# Altium PCB Diana.PcbDoc
Units mm, origin at the board's own origin, x right, y up, seen from the top; angles counter-clockwise.
Board outline 50 x 40 mm, 2 copper layers (Top Layer, Bottom Layer), stack 1.443 mm thick; 44 components, 33 nets, 210 pads, 87 vias.
Unrouted connection lines stored in the file: 40.
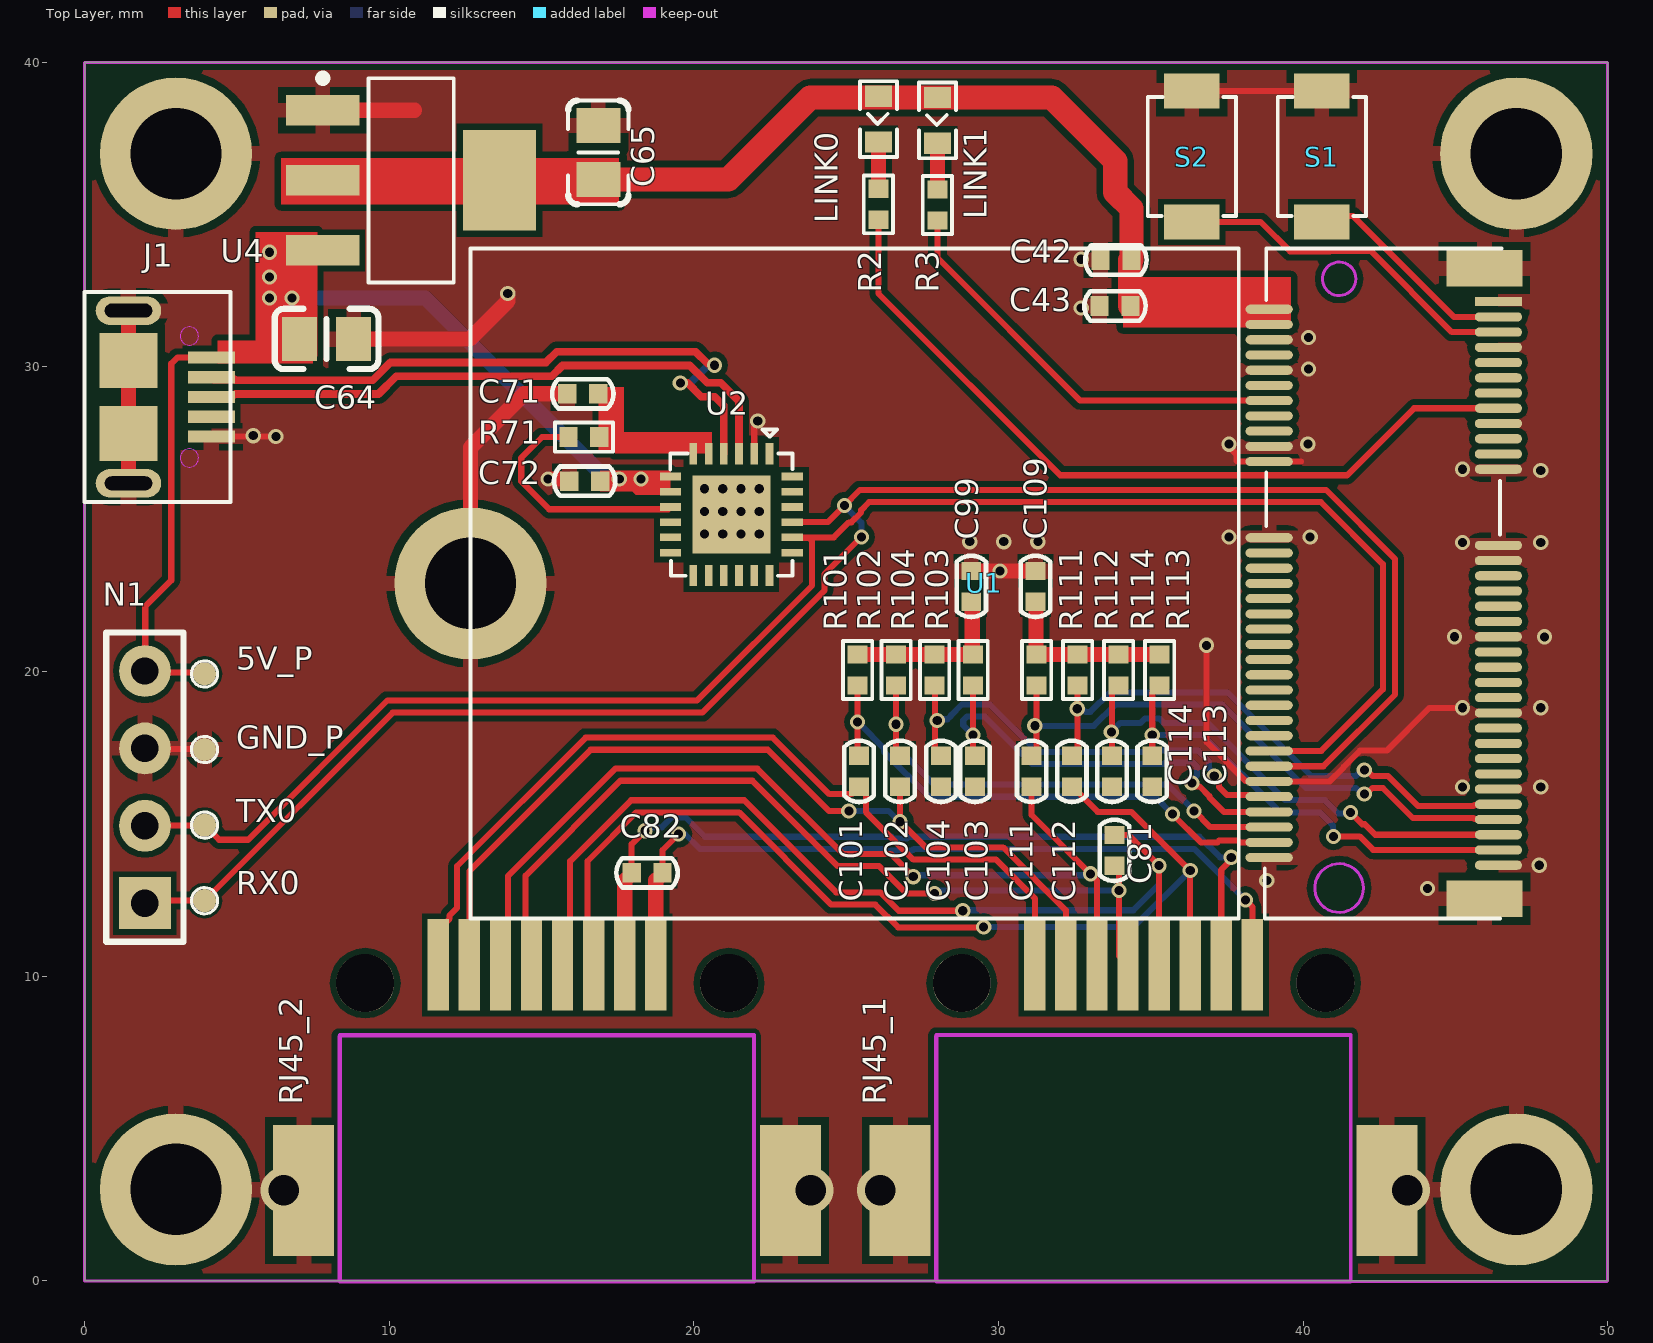
[diagram p0: Top Layer view]
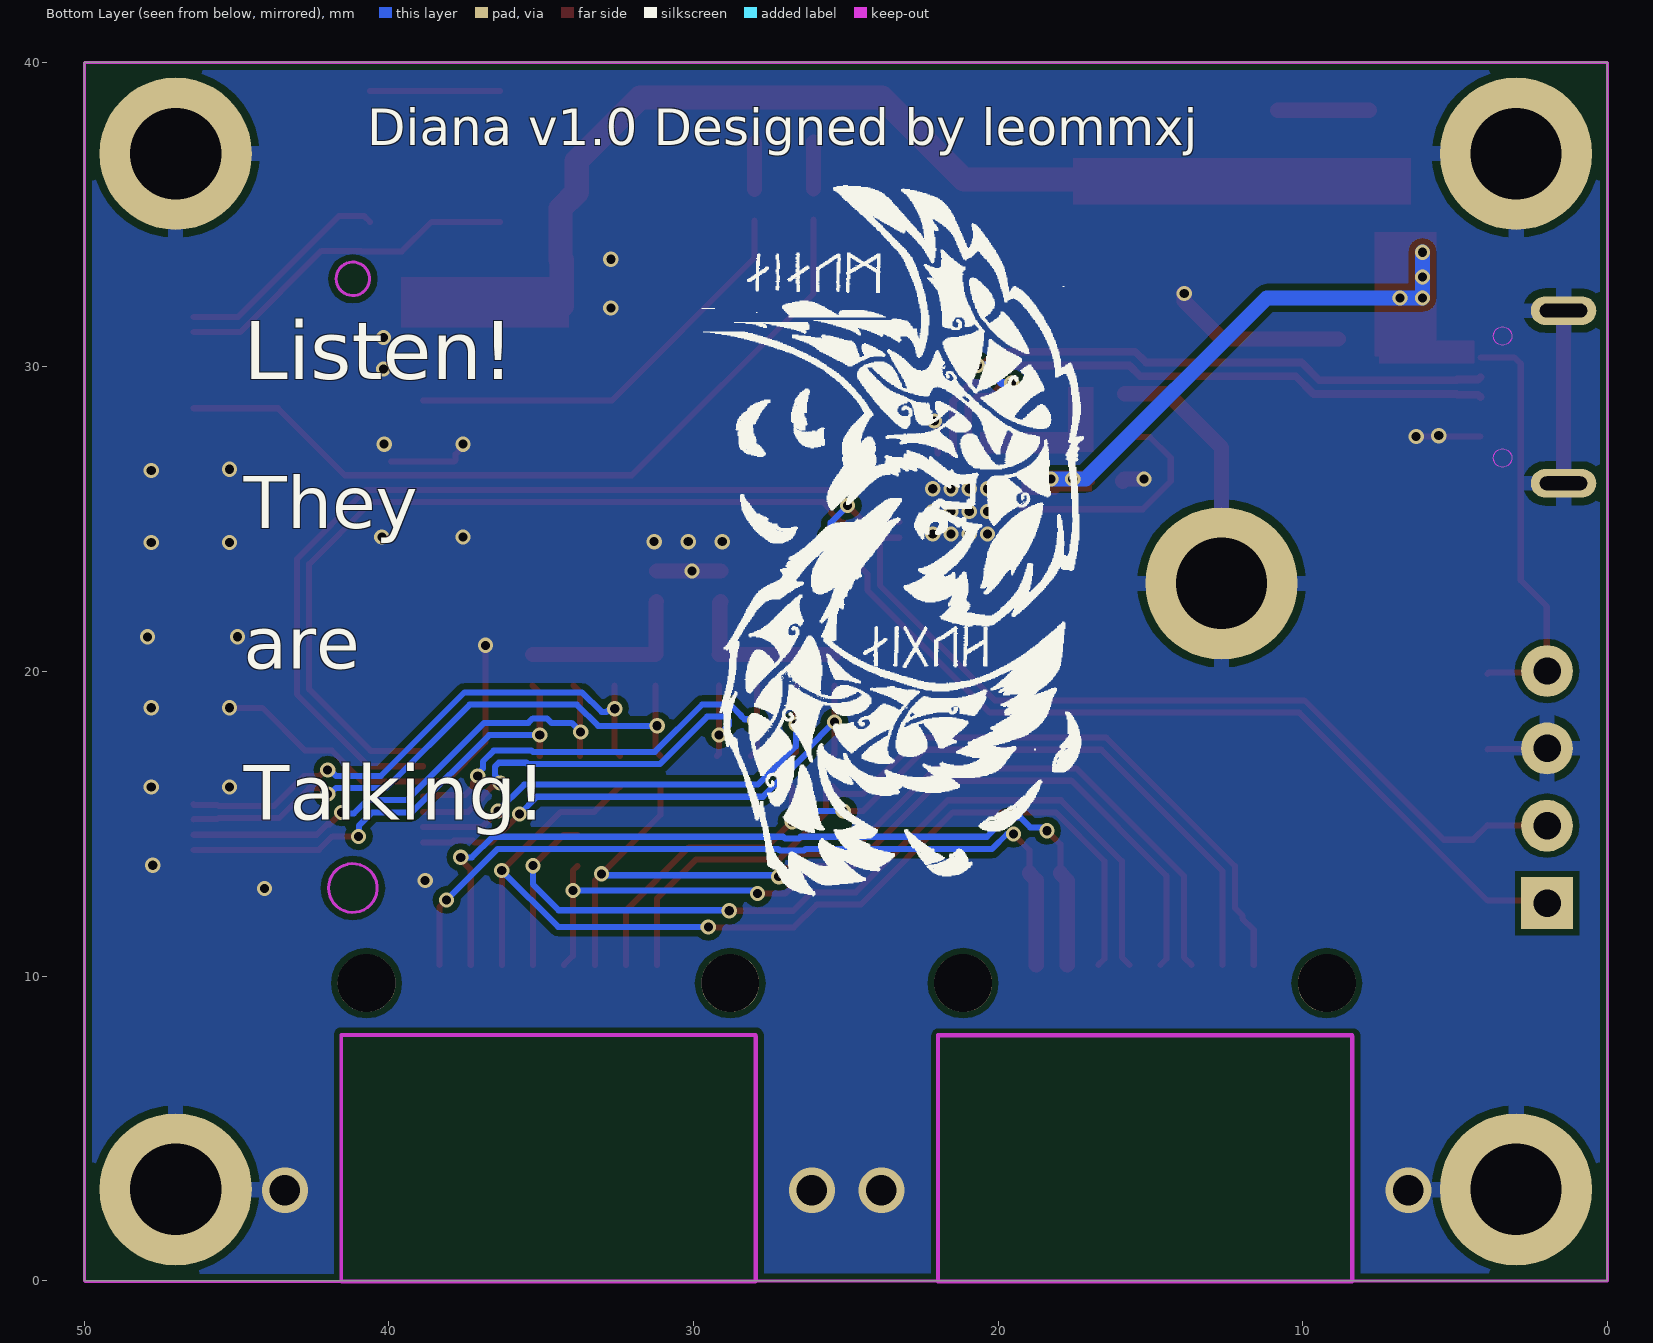
[diagram p1: Bottom Layer view, seen from below]

## Layer stack, top to bottom
Top Solder: solder mask 0.0102, Solder Resist, Dk 3.5
Top Layer: signal copper 0.0356
Dielectric1: core 1.3716, FR-4, Dk 4.8
Bottom Layer: signal copper 0.0356
Bottom Solder: solder mask 0.0102, Solder Resist, Dk 3.5

## Board outline
0,0 50,0 50,40 0,40

## Design rules (kind name [scope] priority, off if disabled: settings)
Clearance [All] p1: gap=0.2 ignorepadtopadclearanceinfootprint=TRUE
ComponentClearance [All] p1 off: gap=0.025 collisioncheckmode=3 verticalgap=0.025 showdistances=FALSE
DiffPairsRouting [All] p1: maxlimit=0.2 minlimit=0.2 mostfreqgap=0.2 toplayer_minwidth=0.2 toplayer_maxwidth=0.2 toplayer_prefwidth=0.2 bottomlayer_minwidth=0.2 bottomlayer_maxwidth=0.2 bottomlayer_prefwidth=0.2 maxuncoupledlength=12.7
FabricationTestPointUsage TestPointUsage [All] p1 off: valid=0 allowmultiple=FALSE
FabricationTestpoint Testpoint [(IsPad And (OnTopLayer Or OnBottomLayer))] p1 off: side=3 testpointundercomponent=TRUE minsize=1.016 maxsize=2.54 preferedsize=1.524 minholesize=0 maxholesize=1.016 preferedholesize=0.813 testpointgrid=0.025 allowsidetop=TRUE allowsidebottom=TRUE usegrid=TRUE gridtolerance=0
HoleSize [All] p1: absolutevalues=TRUE maxlimit=3.81 minlimit=0.203 maxpercent=80.000 minpercent=20.000
MinimumSolderMaskSliver [All] p1 off: minsoldermaskwidth=0.025
PlaneClearance [All] p1: clearance=0.152
PlaneConnect PlaneConnect_isvia [IsVia] p1: planeconnectstyle=Direct reliefexpansion=0.508 reliefentries=4 reliefconductorwidth=0.508 reliefairgap=0.254
PlaneConnect [All] p2: planeconnectstyle=Direct reliefexpansion=0.508 reliefentries=4 reliefconductorwidth=0.635 reliefairgap=0.254
PolygonConnect [All] p1: thpad.connectstyle=Relief thpad.reliefconductorwidth=0.5 thpad.reliefentries=4 thpad.polygonreliefangle="90 Angle" thpad.airgapwidth=0.254 smdpad.connectstyle=Relief smdpad.reliefconductorwidth=0.5 smdpad.reliefentries=4 smdpad.polygonreliefangle="90 Angle" smdpad.airgapwidth=0.254 via.connectstyle=Direct via.reliefconductorwidth=0.254 via.reliefentries=4 via.polygonreliefangle="90 Angle" via.airgapwidth=0.254
RoutingVias [All] p1: holewidth=0.203 width=0.406 viastyle="Through Hole" minholewidth=0.203 minwidth=0.406 maxholewidth=2.54 maxwidth=2.54
ShortCircuit [InNet('WIFI') vs InNet('GND')] p1: allowed=FALSE
SilkToSilkClearance [All] p1: silktosilkclearance=0
SilkToSolderMaskClearance SilkscreenOverComponentPads [IsPad] p1: minsilkscreentomaskgap=0 clearancetoexposedcopper=TRUE
SolderMaskExpansion [All] p1: expansion=0.05
UnRoutedNet [All] p1: checkbadconnections=TRUE
Width [All] p1: maxlimit=0.8 minlimit=0.2 preferedwidth=0.5
18 further rules are at their usual default settings.

## Classes and differential pairs
differential pair P1_T: +P1_T_P -P1_T_N
differential pair P1_R: +P1_R_P -P1_R_N
differential pair P0_T: +P0_T_P -P0_T_N
differential pair P0_R: +P0_R_P -P0_R_N
differential pair U: +U_P -U_N

## Components (designator, comment, footprint, x,y, rotation, side; value= is the part's Value field where it differs from the comment)
5V_P "TEST POINT" TEST-POINT 3.937,19.921 r180 top
C42 "4.7uF" C0402 33.858,33.51 r180 top
C43 "0.1uF" C0402 33.825,32.004 r180 top
C64 "47uF" 0805C 7.944,30.919 r0 top
C65 "47uF" 0805C 16.866,37.041 r270 top
C71 "4.7uF" C0402 16.355,29.118 r180 top
C72 "4.7uF" C0402 16.416,26.25 r0 top
C81 "Cap" C0402 33.807,14.13 r90 top value=220pF
C82 "Cap" C0402 18.466,13.393 r0 top value=220pF
C99 "0.1uF" C0402 29.108,22.797 r90 top
C101 "0.1uF" C0402 25.425,16.726 r270 top
C102 "0.1uF" C0402 26.772,16.726 r270 top
C103 "0.1uF" C0402 29.232,16.726 r270 top
C104 "0.1uF" C0402 28.114,16.726 r270 top
C109 "0.1uF" C0402 31.217,22.797 r90 top
C111 "0.1uF" C0402 31.09,16.726 r270 top
C112 "0.1uF" C0402 32.41,16.726 r270 top
C113 "0.1uF" C0402 35.048,16.726 r270 top
C114 "0.1uF" C0402 33.727,16.726 r270 top
GND_P "TEST POINT" TEST-POINT 3.937,17.44 r180 top (schematic designator GNP_P)
J1 "MK5P microUSB" MICROUSB 2.388,29.014 r270 top
LINK0 "LED" LED0603 26.061,38.133 r270 top (schematic designator DS1)
LINK1 "LED" LED0603 27.999,38.096 r270 top (schematic designator DS2)
N1 "Header 4" HDR-1X4 1.981,12.399 r90 top
R2 "5.1K" R0402 26.061,35.339 r270 top
R3 "5.1K" R0402 27.999,35.314 r90 top
R71 "5.1K" R0402 16.391,27.698 r180 top
R101 "50R" R0402 25.375,20.053 r270 top
R102 "50R" R0402 26.639,20.053 r270 top
R103 "50R" R0402 29.167,20.053 r270 top
R104 "50R" R0402 27.903,20.053 r270 top
R111 "50R" R0402 31.25,20.053 r270 top
R112 "50R" R0402 32.596,20.053 r270 top
R113 "50R" R0402 35.289,20.053 r270 top
R114 "50R" R0402 33.942,20.053 r270 top
RJ45_1 "RJ45" RJ45 34.765,10.371 r0 top
RJ45_2 "RJ45" RJ45 15.181,10.371 r0 top
RX0 "TEST POINT" TEST-POINT 3.937,12.479 r0 top
S1 "SW-BUTTON" MINIBUTTON 40.615,36.914 r270 top
S2 "SW-BUTTON" MINIBUTTON 36.347,36.914 r270 top
TX0 "TEST POINT" TEST-POINT 3.937,14.96 r180 top
U1 "BIT5" NGFF_M_2-EKEY 29.54,22.893 r270 top locked
U2 "CP2104" QFN24 21.234,25.154 r270 top
U4 "LM1117-3.3" SOT223-4N 10.719,36.126 r0 top

## Footprints (in the part's own frame and the unit in brackets; to place one, negate y for a bottom-side part, rotate by r counter-clockwise, add the part's x,y. Pads: shape width x height; smd on the part's side, far side on the other; paste and mask are expansions set on the pad)
0805C [mm]
  rect 1.15x1.45 smd: 1(-0.889,0) 2(0.889,0)
  silkscreen extent -1.7,-0.99 1.7,0.99, body extent -1,-0.63 1,0.63, height 0.78
C0402 [mm]
  rect 0.6x0.65 smd: 1(-0.508,0) 2(0.508,0)
  silkscreen extent -1.01,-0.48 1.01,0.48, body extent -0.51,-0.23 0.49,0.27, height 0.5
HDR-1X4 [mm] "排针，4脚"
  rect 1.7x1.7 hole 0.9: 1(0,0)
  round 1.7 hole 0.9: 2(2.54,0) 3(5.08,0) 4(7.62,0)
  silkscreen extent -1.27,-1.27 8.89,1.27, body extent -1.27,-1.27 8.89,1.27, height 8.5
LED0603 [mm]
  rect 0.7x0.9 smd: A(-0.75,0) K(0.75,0)
  silkscreen extent -1.24,-0.61 1.24,0.61
MICROUSB [mil]
  rect 15.75x60.31 smd: 1(-51.17,70.09) 2(-25.58,70.09) 3(0.01,70.09) 4(25.6,70.09) 5(51.19,70.09)
  oval 37x84.65 hole 17.72 slot 61.02 at 90 deg: 6(-111.6,-37.26) 7(111.62,-37.26)
  rect 70.87x74.8 smd: 8(-47.23,-37.26) 9(47.25,-37.26)
  Keep-Out Layer lines w1: 78.75,29.67 ccw(c78.75,41.48) 78.75,53.29 ccw(c78.75,41.48) 78.75,29.67 ; -78.73,29.67 ccw(c-78.73,41.48) -78.73,53.29 ccw(c-78.73,41.48) -78.73,29.67
  silkscreen extent -136,-94 136,94
MINIBUTTON [mm] "MINIBUTTON"
  rect 1.14x1.83 smd: 1(-2.144,0.002) 2(2.156,0.002)
  silkscreen extent -1.95,-1.45 1.96,1.45
NGFF_M_2-EKEY [mm]
  rect 1.2x2.5 smd: 0(-10.35,16.416) 0(10.35,16.416)
  round 5 hole 3: 0(0,-16.873)
  rect 0.3x1.55 smd: 1(-9.25,16.873)
  oval 0.3x1.55 smd: 2(-9,9.348) 3(-8.75,16.873) 4(-8.5,9.348) 5(-8.25,16.873) 6(-8,9.348) 7(-7.75,16.873) 8(-7.5,9.348) 9(-7.25,16.873) 10(-7,9.348) 11(-6.75,16.873) 12(-6.5,9.348) 13(-6.25,16.873) 14(-6,9.348) 15(-5.75,16.873) 16(-5.5,9.348) 17(-5.25,16.873) 18(-5,9.348) 19(-4.75,16.873) 20(-4.5,9.348) 21(-4.25,16.873) 22(-4,9.348) 23(-3.75,16.873) 32(-1.5,9.348) 33(-1.25,16.873) 34(-1,9.348) 35(-0.75,16.873) 36(-0.5,9.348) 37(-0.25,16.873) 38(0,9.348) 39(0.25,16.873) 40(0.5,9.348) 41(0.75,16.873) 42(1,9.348) 43(1.25,16.873) 44(1.5,9.348) 45(1.75,16.873) 46(2,9.348) 47(2.25,16.873) 48(2.5,9.348) 49(2.75,16.873) 50(3,9.348) 51(3.25,16.873) 52(3.5,9.348) 53(3.75,16.873) 54(4,9.348) 55(4.25,16.873) 56(4.5,9.348) 57(4.75,16.873) 58(5,9.348) 59(5.25,16.873) 60(5.5,9.348) 61(5.75,16.873) 62(6,9.348) 63(6.25,16.873) 64(6.5,9.348) 65(6.75,16.873) 66(7,9.348) 67(7.25,16.873) 68(7.5,9.348) 69(7.75,16.873) 70(8,9.348) 71(8.25,16.873) 72(8.5,9.348) 73(8.75,16.873) 74(9,9.348) 75(9.25,16.873)
  Keep-Out Layer circle w0.1: c-10,11.645 r0.55
  Keep-Out Layer circle w0.1: c10,11.645 r0.8
  silkscreen extent -11,-16.87 11,16.98
QFN24 [mm]
  rect 0.7x0.25 smd: 1(-2,1.25) 2(-2,0.75) 3(-2,0.25) 4(-2,-0.25) 5(-2,-0.75) 6(-2,-1.25) 13(2,-1.25) 14(2,-0.75) 15(2,-0.25) 16(2,0.25) 17(2,0.75) 18(2,1.25)
  rect 0.25x0.7 smd: 7(-1.25,-2) 8(-0.75,-2) 9(-0.25,-2) 10(0.25,-2) 11(0.75,-2) 12(1.25,-2) 19(1.25,2) 20(0.75,2) 21(0.25,2) 22(-0.25,2) 23(-0.75,2) 24(-1.25,2)
  rect 2.55x2.55 smd: 25(0,0)
  silkscreen extent -2.79,-2.01 2.01,2.01
R0402 [mm]
  rect 0.6x0.65 smd: 1(-0.508,0) 2(0.508,0)
  silkscreen extent -0.95,-0.48 0.95,0.48, body extent -0.47,-0.25 0.53,0.25, height 0.35
RJ45 [mm]
  rect 0.7x3 smd: 1(-3.57,0) 2(-2.55,0) 3(-1.53,0) 4(-0.51,0) 5(0.51,0) 6(1.53,0) 7(2.55,0) 8(3.57,0)
  rect 2x4.3 smd: 9(-7.99,-7.4) 10(7.99,-7.4)
  round 1.9 hole 1.9: ""(-5.97,-0.6) ""(5.97,-0.6)
  Keep-Out Layer lines w0.127: -6.8,-10.4 -6.8,-2.3 6.8,-2.3 6.8,-10.4 -6.8,-10.4
SOT223-4N [mm]
  rect 2.4x1 smd: 1(-2.9,2.3) 2(-2.9,0) 3(-2.9,-2.3)
  rect 2.4x3.3 smd: 4(2.9,0)
  silkscreen extent -3.02,-3.35 1.4,3.47, body extent -1.85,-3.35 1.85,3.35, height 1.7
TEST-POINT [mil]
  round 30 smd paste-15.75: 1(0,0)
  silkscreen extent -17,-17 17,17

## Part data
5V_P GND_P RX0 TX0: library part TP, "Description"
C42 C43 C64 C65 C71 C72 C99 C101 C102 C103 C104 C109 C111 C112 C113 C114: library part CAP, "普通小电容"
C81 C82: "Capacitor", LatestRevisionDate=17-Jul-2002, LatestRevisionNote="Re-released for DXP Platform.", PackageDescription="Radial Cap, Thru-Hole; 2 Leads; 0.3 in Pin Spacing", PackageReference=RAD-0.3, Published=8-Jun-2000, Publisher="Altium Limited"
J1: library part MICRO_USB, "4固定脚microUSB座"
LINK0 LINK1: "RED"
N1: "Header, 4-Pin", LatestRevisionDate=17-Jul-2002, LatestRevisionNote="Re-released for DXP Platform.", Publisher="Altium Limited"
R2 R3 R71 R101 R102 R103 R104 R111 R112 R113 R114: library part RES, "普通电阻"
RJ45_1 RJ45_2: "RJ45不带网络变压器"
U1: "NGFF M.2 E KEY"
U4: "800mA and 1A Low Dropout Positive Regulator 2.85V, 3.3V, 5V, and Adjustable", PackageDocument=revC, ComponentLink1Description="Manufacturer Link", ComponentLink1URL=http://www.ti.com/, DatasheetDocument=Sep-1997, LatestRevisionDate=17-Jul-2002, LatestRevisionNote="Re-released for DXP Platform.", PackageReference=ZZ311, Published=8-Jun-2000, Publisher="Altium Limited"

## Free pads (board coordinates)
  round 5 hole 3: 0(3,3) 0(3,37) 0(47,3) 0(47,37)

## Via types
v1: diameter 0.5, hole 0.3, Top Layer to Bottom Layer, tented both sides, 83 vias
v2: diameter 1.5, hole 1, Top Layer to Bottom Layer, 4 vias

## Nets (pads, with @x,y where several pads share a name; then routed paths per layer and width w, separated by ;. In a path a pad name is that pad's centre, name@x,y a point inside that pad or via, vN(x,y) a via of type N, cw(c..) or ccw(c..) an arc to the next point about the centre after c; other vN are vias at no path point)
3.3VD: C42.1 C43.1 C65.2 LINK0.A LINK1.A U1.2 U1.4 U4.2 U4.4 | length 33
  Top Layer w0.8: U4.2 U4.4 13.644,36.152 C65.2 21.133,36.152 23.827,38.846 LINK1.A 31.749,38.846 33.833,36.761 33.833,35.734 34.366,35.2 C42.1@34.366,33.544 ; C43.1 34.333,33.51 C42.1@34.366,33.544 ; C42.1 C42.1@34.366,33.544
5V: 5V_P.1 C64.1 C72.2 J1.1 N1.4 U2.7 U2.8 U4.3 | length 32.6
  Top Layer w0.2: 5V_P.1 3.888,19.97 2.03,19.97 N1.4 1.991,20.029 1.991,22.141 2.845,22.995 2.845,30.107 3.052,30.314 J1.1 ; C72.2 16.924,26.225 17.806,26.225 18.127,25.904 U2.8
  Bottom Layer w0.5: v1(6.071,33.764) v1(6.071,32.951) v1(6.071,32.266) v1(6.807,32.266) 11.184,32.266 17.128,26.322 v1(17.551,26.322) v1(18.263,26.322) v1@18.415,26.322
GND: C42.2 C43.2 C64.2 C65.1 C71.2 C72.1 C99.2 C109.2 GND_P.1 J1.5 J1.6 J1.7 J1.8 J1.9 N1.3 pad.0 RJ45_1.9 RJ45_1.10 RJ45_2.9 RJ45_2.10 S1.1 S2.1 U1.0 U1.1 U1.6 U1.7 U1.10 U1.17 U1.20 U1.22 U1.23 U1.32 U1.33 U1.35 U1.45 U1.55 U1.64 U1.65 U1.74 U1.75 U2.2 U2.25 U4.1 | length 51.1
  Top Layer w0.2: N1.3 2,17.46 3.918,17.46 GND_P.1 ; J1.5 v1(6.279,27.714) ; U2.2 21.984,28.032 22.098,28.146 v1(22.098,28.227) ; S2.1 S1.1 ; v1(36.83,20.861) 36.83,17.69 38.108,16.412 38.869,16.412 U1.64 40.871,16.393 41.327,16.849 41.327,16.865 41.869,17.407 42.748,17.407 44.152,18.81 v1(45.237,18.81) ; v1(37.567,27.465) 37.567,27.384 37.813,27.137 37.813,26.931 37.852,26.893 U1.22 39.925,26.893
  Top Layer w0.5: J1.7 J1.9 J1.8 J1.6 ; U4.1 10.834,38.426 ; C64.2 12.649,30.919 13.894,32.164 v1(13.894,32.411) ; U1.0@12.667,22.893 12.667,27.356 14.429,29.118 C71.2 ; v1(15.212,26.325) 15.858,26.325 15.908,26.275 C72.1 ; C99.2 C109.2
  other v1: 44.089,12.879 38.811,13.139 47.752,13.642 45.237,16.213 47.803,16.213 47.803,18.81 44.976,21.143 47.924,21.139 30.048,23.305 45.237,24.239 47.803,24.239 29.056,24.265 30.174,24.265 31.293,24.265 37.567,24.417 40.234,24.417 20.351,24.515 20.95,24.515 21.55,24.515 22.149,24.515 20.351,25.257 20.95,25.257 21.55,25.257 22.149,25.257 20.351,26 20.95,26 21.55,26 22.149,26 47.803,26.601 45.237,26.643 40.157,27.465 5.537,27.744 40.183,29.93 40.183,30.97 32.715,31.935 32.715,33.536
  other v2: 6.531,2.971 23.831,2.971 26.115,2.971 43.415,2.971
NetC71_1: C71.1 R71.1 U2.5 U2.6
NetC81_1: C81.1 RJ45_1.4 RJ45_2.4 | length 28.8
  Top Layer w0.2: RJ45_2.4 14.478,10.564 14.478,13.302 17.592,16.416 21.92,16.416 24.724,13.612 26.08,13.612 26.976,12.716 v1(27.898,12.716) ; C81.1 33.961,13.469 33.961,10.665 RJ45_1.4
  Bottom Layer w0.2: v1(27.898,12.716) 27.992,12.81 v1(33.961,12.81)
NetC81_2: C81.2 RJ45_1.5 RJ45_2.5 | length 31.3
  Top Layer w0.2: RJ45_2.5 15.941,10.621 15.941,13.775 17.941,15.775 21.654,15.775 24.677,12.752 26.124,12.752 26.728,12.149 v1(28.829,12.149) ; C81.2 34.265,14.638 v1(35.275,13.628) RJ45_1.5
  Bottom Layer w0.2: v1(28.829,12.149) 28.846,12.165 34.429,12.165 35.275,13.011 v1(35.275,13.628)
NetC82_1: C82.1 RJ45_1.7 RJ45_2.7 | length 28.4
  Top Layer w0.2: C82.1 17.958,14.333 v1(18.402,14.776) ; RJ45_1.7 37.315,13.492 37.643,13.82 v1(37.643,13.901)
  Top Layer w0.5: RJ45_2.7 17.731,13.142 17.958,13.368 C82.1
  Bottom Layer w0.2: v1(18.402,14.776) 18.501,14.875 18.949,14.875 18.949,14.896 19.271,15.218 19.727,15.218 20.367,14.578 26.486,14.578 26.544,14.52 26.999,14.52 27.058,14.578 36.598,14.578 37.274,13.901 v1(37.643,13.901)
NetC82_2: C82.2 RJ45_1.8 RJ45_2.8 | length 26.4
  Top Layer w0.2: C82.2 18.974,14.143 v1(19.499,14.668) ; v1(38.108,12.502) 38.335,12.276 RJ45_1.8
  Top Layer w0.5: RJ45_2.8 18.751,13.146 18.974,13.368 C82.2
  Bottom Layer w0.2: v1(19.499,14.668) 19.711,14.668 20.201,14.178 26.32,14.178 26.378,14.12 27.165,14.12 27.223,14.178 36.432,14.178 v1(38.108,12.502)
NetC99_1: C99.1 R101.1 R102.1 R103.1 R104.1 | length 5.5
  Top Layer w0.5: R101.1 R102.1 R104.1 R103.1 29.138,20.591 29.138,22.259 C99.1
NetC109_1: C109.1 R111.1 R112.1 R113.1 R114.1 | length 5.8
  Top Layer w0.5: C109.1 31.233,22.272 31.233,20.578 R111.1 R112.1 R114.1 R113.1
NetDS1_K: LINK0.K R2.1 | length 1.5
  Top Layer w0.5: R2.1 LINK0.K
NetDS2_K: LINK1.K R3.2 | length 1.5
  Top Layer w0.5: R3.2 LINK1.K
NetR2_2: R2.2 U1.15 | length 26.2
  Top Layer w0.2: R2.2 26.061,32.411 32.029,26.443 41.447,26.443 43.647,28.643 U1.15
NetR3_1: R3.1 U1.14 | length 14.1
  Top Layer w0.2: R3.1 27.999,33.578 32.684,28.893 U1.14
NetR71_2: R71.2 U2.9 | length 7.9
  Top Layer w0.2: R71.2 15.015,27.698 14.334,27.017 14.334,26.247 15.252,25.329 19.159,25.329 U2.9
NetS1_2: S1.2 U1.3 | length 7.2
  Top Layer w0.2: S1.2 40.811,34.952 41.645,34.952 44.954,31.643 U1.3
NetS2_2: S2.2 U1.5 | length 11.6
  Top Layer w0.2: S2.2 38.608,34.758 39.573,33.793 40.886,33.793 40.904,33.811 42.221,33.811 44.888,31.143 U1.5
P0_R_N: C102.1 R102.2 U1.70 | length 16.4
  Top Layer w0.2: R102.2 v1(26.639,18.27) 26.639,17.367 C102.1 ; v1(36.424,15.425) 36.956,14.893 U1.70
  Bottom Layer w0.2: v1(26.639,18.27) 26.639,17.539 27.889,16.289 35.56,16.289 v1(36.424,15.425)
P0_R_P: C101.1 R101.2 U1.72 | length 17.5
  Top Layer w0.2: R101.2 v1(25.375,18.346) 25.375,17.285 C101.1 ; v1(35.712,15.324) 36.643,14.393 37.187,14.393 37.246,14.452 37.702,14.452 37.871,14.451 37.929,14.393 U1.72
  Bottom Layer w0.2: v1@25.476,18.296 25.473,18.292 25.473,18.248 26.239,17.482 26.239,17.374 27.724,15.889 35.147,15.889 v1(35.712,15.324)
P0_T_N: C104.1 R104.2 U1.66 | length 15.1
  Top Layer w0.2: R104.2 27.914,19.535 27.914,17.434 C104.1 ; v1(37.084,16.568) 37.084,16.487 37.234,16.337 37.234,16.219 37.51,15.943 38.404,15.943 38.454,15.893 U1.66
  Bottom Layer w0.2: v1(27.991,18.393) 28.031,18.433 28.328,18.433 28.446,18.55 28.446,18.568 28.797,18.919 29.718,18.919 31.272,17.365 35.276,17.365 35.316,17.405 36.56,17.405 36.912,17.053 36.912,16.822 37.084,16.65 v1(37.084,16.568)
P0_T_P: C103.1 R103.2 U1.68 | length 15
  Top Layer w0.2: R103.2 v1(29.167,17.915) 29.167,17.298 C103.1 ; v1(36.349,16.338) 36.458,16.229 36.601,16.229 36.923,15.907 36.923,15.872 37.401,15.393 U1.68
  Bottom Layer w0.2: v1(29.167,17.915) 28.846,18.236 28.846,18.402 28.963,18.519 29.552,18.519 31.107,16.965 35.442,16.965 35.482,17.005 36.395,17.005 36.512,16.888 36.512,16.581 36.349,16.419 v1(36.349,16.338)
P1_R_N: C112.1 R112.2 U1.67 | length 18.2
  Top Layer w0.2: C112.1 32.596,17.42 R112.2 ; v1(42.012,16.772) 42.085,16.772 42.279,16.578 42.786,16.578 43.771,15.593 45.602,15.593 45.633,15.624 46.394,15.624 U1.67
  Bottom Layer w0.2: v1(32.588,18.778) 32.646,18.721 32.809,18.721 32.855,18.675 33.021,18.675 33.664,19.318 37.52,19.318 40.26,16.578 41.744,16.578 41.938,16.772 v1(42.012,16.772)
P1_R_P: C111.1 R111.2 U1.69 | length 19.6
  Top Layer w0.2: C111.1 31.25,17.395 R111.2 ; v1(42.012,15.984) 42.085,15.984 42.279,16.178 42.621,16.178 43.606,15.193 45.602,15.193 45.633,15.162 46.394,15.162 U1.69
  Bottom Layer w0.2: v1(31.195,18.219) 33.131,18.219 33.83,18.918 37.354,18.918 40.094,16.178 41.744,16.178 41.938,15.984 v1(42.012,15.984)
P1_T_N: C114.1 R114.2 U1.71 | length 16.9
  Top Layer w0.2: C114.1 33.727,19.33 R114.2 ; v1(41.554,15.375) 41.942,14.987 42.025,14.987 42.369,14.643 U1.71
  Bottom Layer w0.2: v1(33.706,18.016) 34.004,18.315 34.67,18.315 34.82,18.465 35.276,18.465 35.426,18.315 36.877,18.315 39.414,15.778 40.714,15.778 41.147,15.345 41.525,15.345 v1(41.554,15.375)
P1_T_P: C113.1 R113.2 U1.73 | length 15.6
  Top Layer w0.2: C113.1 v1(35.048,17.915) 35.048,19.305 R113.2 ; v1@40.924,14.587 v1(40.996,14.587) 41.859,14.587 42.303,14.143 U1.73
  Bottom Layer w0.2: v1(35.048,17.915) 36.711,17.915 39.248,15.378 40.548,15.378 40.978,14.948 40.978,14.605 v1(40.996,14.587)
P_P0_RN: C102.2 RJ45_1.2 RJ45_2.2 | length 29.4
  Top Layer w0.2: RJ45_2.2 12.631,13.452 16.612,17.432 22.428,17.432 24.435,15.425 v1(25.089,15.425) ; C102.2 v1(26.772,15.07) 27.616,14.225 30.156,14.225 32.215,12.167 RJ45_1.2
  Bottom Layer w0.2: v1(25.089,15.425) 26.391,15.425 26.746,15.07 v1(26.772,15.07)
P_P0_RP: C101.2 RJ45_1.1 RJ45_2.1 | length 29.2
  Top Layer w0.2: RJ45_2.1 11.611,11.521 11.981,11.891 11.981,11.995 12.231,12.245 12.231,13.617 16.446,17.832 22.594,17.832 24.45,15.975 25.183,15.975 C101.2 25.45,16.218 25.65,16.018 25.65,15.385 27.21,13.825 29.921,13.825 31.195,12.552 RJ45_1.1
P_P1_RN: C112.2 RJ45_1.6 RJ45_2.6 | length 34.4
  Top Layer w0.2: RJ45_2.6 16.51,10.572 16.51,13.778 18.107,15.375 21.488,15.375 24.511,12.352 25.959,12.352 26.712,11.599 29.498,11.599 v1(29.515,11.615) ; C112.2 32.435,16.218 33.26,15.393 34.366,15.393 v1(36.295,13.465) RJ45_1.6
  Bottom Layer w0.2: v1(29.515,11.615) 34.445,11.615 v1(36.295,13.465)
P_P1_RP: C111.2 RJ45_1.3 RJ45_2.3 | length 31.8
  Top Layer w0.2: RJ45_2.3 13.901,10.621 13.901,13.291 17.427,16.816 22.086,16.816 24.89,14.012 26.458,14.012 v1(27.203,13.266) ; C111.2 31.09,15.291 v1(33.02,13.36) 33.235,13.146 RJ45_1.3
  Bottom Layer w0.2: v1(27.203,13.266) 27.25,13.313 32.973,13.313 v1(33.02,13.36)
U_N: J1.2 U2.4 | length 21.8
  Top Layer w0.254: J1.2 4.241,29.591 4.931,29.591 4.956,29.566 9.459,29.566 10.042,30.149 15.148,30.149 15.502,30.503 20.055,30.503 20.455,30.103 20.629,30.103 v1(20.676,30.056) ; v1(19.558,29.472) 19.802,29.472 20.249,29.025 20.691,29.025 20.984,28.731 U2.4
  Bottom Layer w0.254: v1(19.558,29.472) 19.888,29.472 20.472,30.056 v1(20.676,30.056)
U_P: J1.3 U2.3 | length 20
  Top Layer w0.254: J1.3 4.241,29.087 4.931,29.087 4.956,29.112 9.647,29.112 10.23,29.695 15.336,29.695 15.69,30.049 19.867,30.049 20.437,29.479 20.879,29.479 21.484,28.873 U2.3
UART_RXD0: N1.1 RX0.1 U1.62 U2.21 | length 60.8
  Top Layer w0.2: N1.1 2.061,12.479 RX0.1 10.109,18.651 20.276,18.651 24.284,22.66 24.284,23.2 v1(25.502,24.417) ; U2.21 24.398,24.904 v1(24.943,25.449) 25.454,25.96 40.755,25.96 43.021,23.694 43.021,19.248 40.667,16.893 U1.62
  Bottom Layer w0.2: v1(24.943,25.449) 25.502,24.89 v1(25.502,24.417)
UART_TXD0: N1.2 TX0.1 U1.60 U2.20 | length 57.2
  Top Layer w0.2: N1.2 1.992,14.949 3.927,14.949 TX0.1 4.418,14.479 5.371,14.479 9.944,19.051 20.11,19.051 23.884,22.825 23.884,24.286 23.792,24.379 23.259,24.379 U2.20 24.594,24.404 25.089,24.899 25.171,24.899 25.493,25.221 25.493,25.302 25.751,25.56 40.589,25.56 42.621,23.528 42.621,19.413 40.601,17.393 U1.60
pads on no net: C103.2 C104.2 C113.2 C114.2 J1.4 RJ45_1. RJ45_2. U1.8 U1.9 U1.11 U1.12 U1.13 U1.16 U1.18 U1.19 U1.21 U1.34 U1.36 U1.37 U1.38 U1.39 U1.40 U1.41 U1.42 U1.43 U1.44 U1.46 U1.47 U1.48 U1.49 U1.50 U1.51 U1.52 U1.53 U1.54 U1.56 U1.57 U1.58 U1.59 U1.61 U1.63 U2.1 U2.10 U2.11 U2.12 U2.13 U2.14 U2.15 U2.16 U2.17 U2.18 U2.19 U2.22 U2.23 U2.24

## Polygon pours and split planes (outlines as drawn)
GND on Bottom Layer "Bottom Layer-GND" (solid, remove dead copper, pour order 0): 0,40 50,40 50,0 0,0
GND on Top Layer "Top Layer-GND" (solid, remove dead copper, pour order 2): 0,40 50,40 50,0 0,0

## Keep-outs
Keep-Out Layer:
  lines w0.1: 49.971,-0.029 41.565,-0.029 41.565,8.071 27.965,8.071 27.935,8.042 27.935,0 21.952,0 21.952,8.042 8.352,8.042 8.352,0 0,0 0,40 50,40 50,0

## Other copper
Top Layer:
  rectangle net 5V: 4.369,30.107 7.493,30.869
  rectangle net 5V: 5.613,30.335 7.645,34.425
  rectangle net NetC71_1: 17.406,27.154 20.592,27.867
  rectangle net NetC71_1: 16.863,27.215 17.707,29.347
  rectangle net 3.3VD: 34.087,31.289 39.599,32.951
  rectangle net 3.3VD: 6.452,35.339 17.551,36.863
  rectangle net 5V: 16.924,25.904 19.234,26.601

## Silkscreen, mask and mechanical layers (free items; w line width, h text height)
Bottom Overlay:
  drawing of 7029 lines, arcs and shapes, not listed
  text "Diana v1.0 Designed by leommxj" at 40.704,37.271 h1.2
  text "Listen!" at 44.759,29.598 h1.9
  text "They" at 44.759,24.708 h1.7
  text "are" at 44.759,20.085 h1.7
  text "Talking!" at 44.759,15.132 h1.8
Drill Drawing:
  lines w0.1: 0,0 8.352,0 8.352,8.042 21.952,8.042 21.952,0 27.935,0 27.935,8.042 27.965,8.071 41.565,8.071 41.565,-0.029 49.971,-0.029

## Text inside footprints (layer, text, board x,y; h text height)
C64: Mechanical 15 "1" at 7.852,29.743 h1.3
C65: Mechanical 15 "1" at 15.929,37.239 h1.3 r270
RJ45_1: Keep-Out Layer "CUT OFF" at 29.812,3.386 h1.3
RJ45_2: Keep-Out Layer "CUT OFF" at 10.228,3.386 h1.3